# Altium PCB Board_Large_Unit_Altium.pcbdoc
Units mil, origin at the board's own origin, x right, y up, seen from the top; angles counter-clockwise.
Board outline 4364.75 x 4997.56 mil, 2 copper layers (Top Layer, Bottom Layer); 46 components, 24 nets, 152 pads, 33 vias.
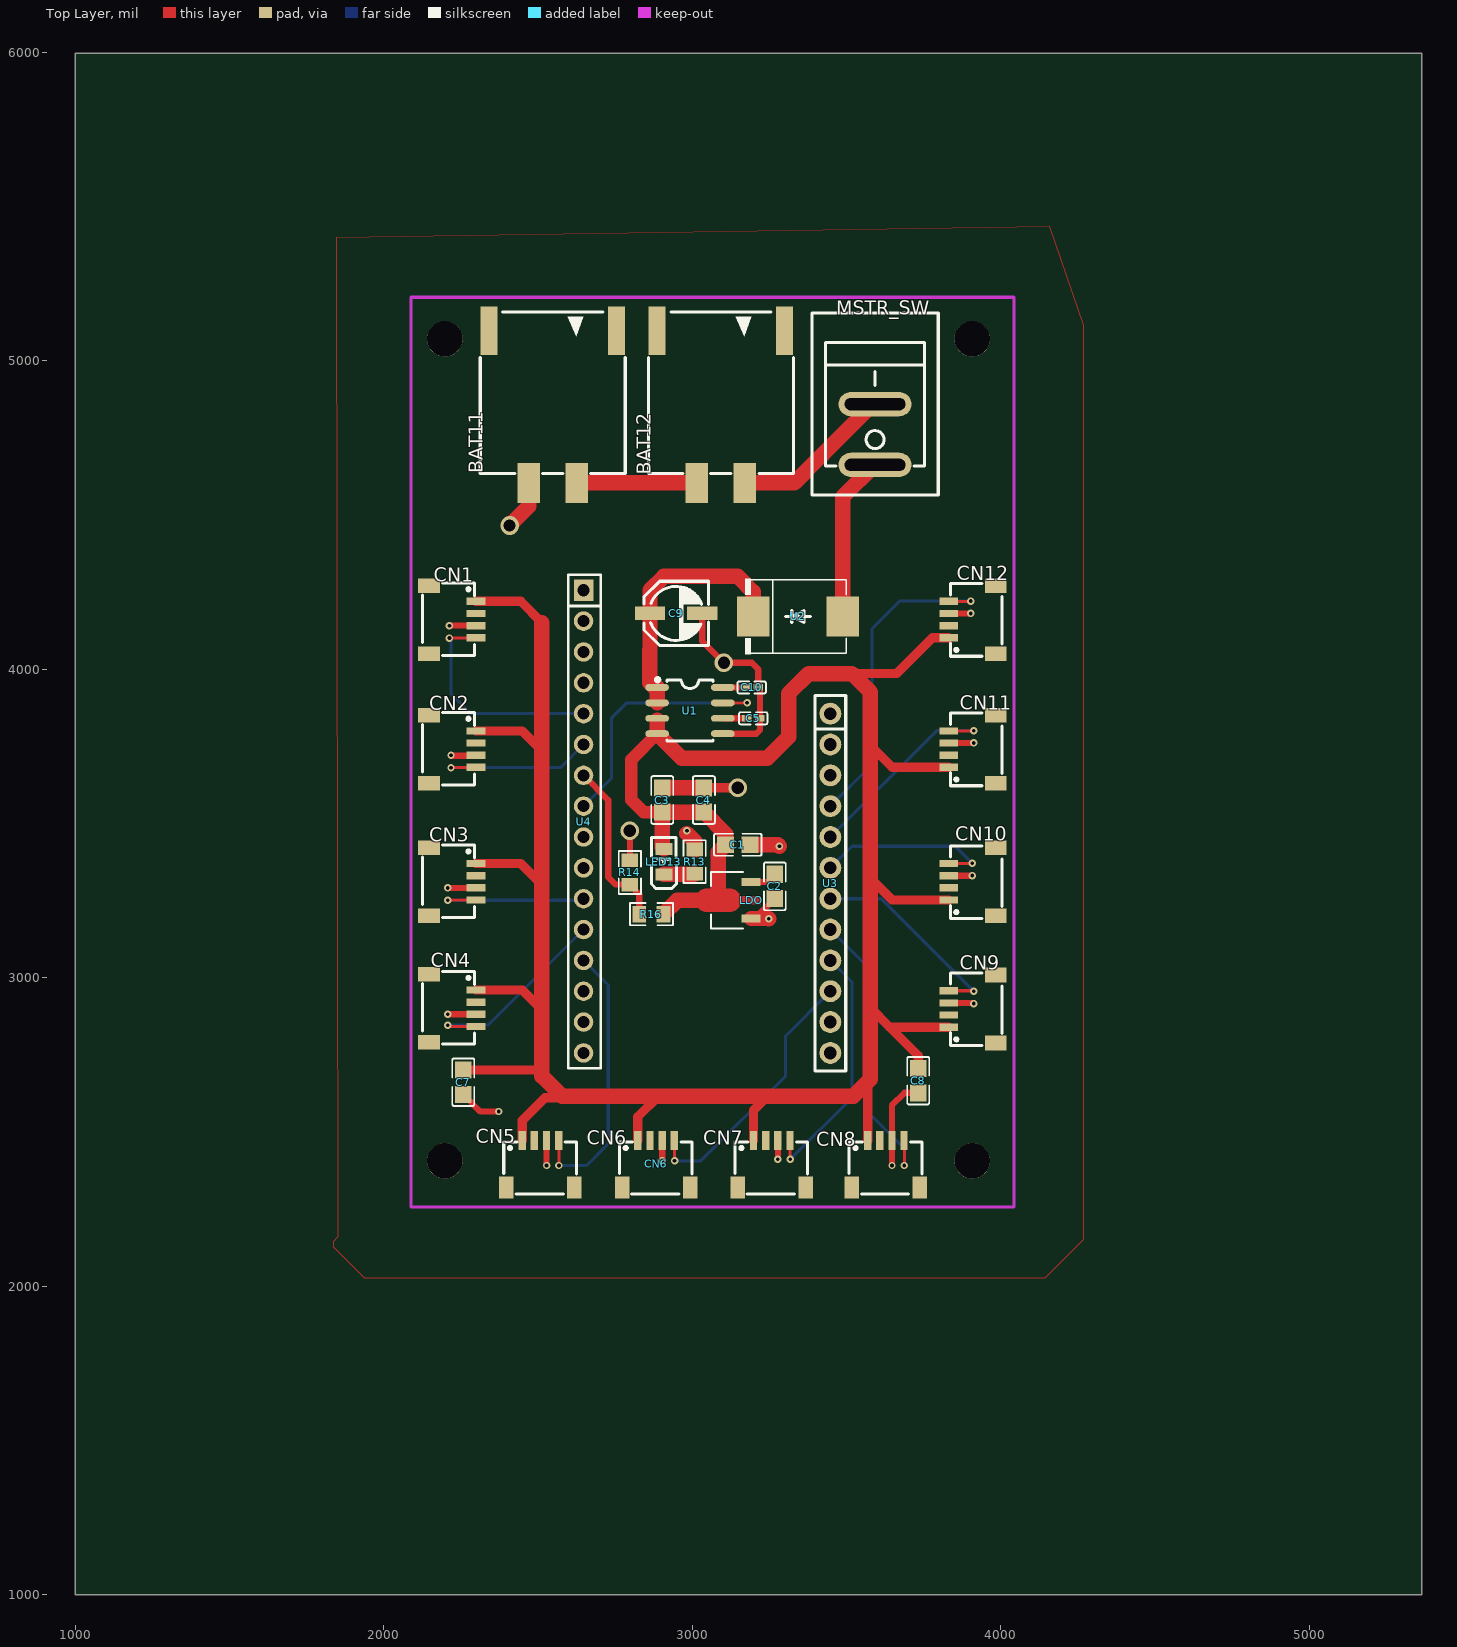
[diagram p0: Top Layer view]
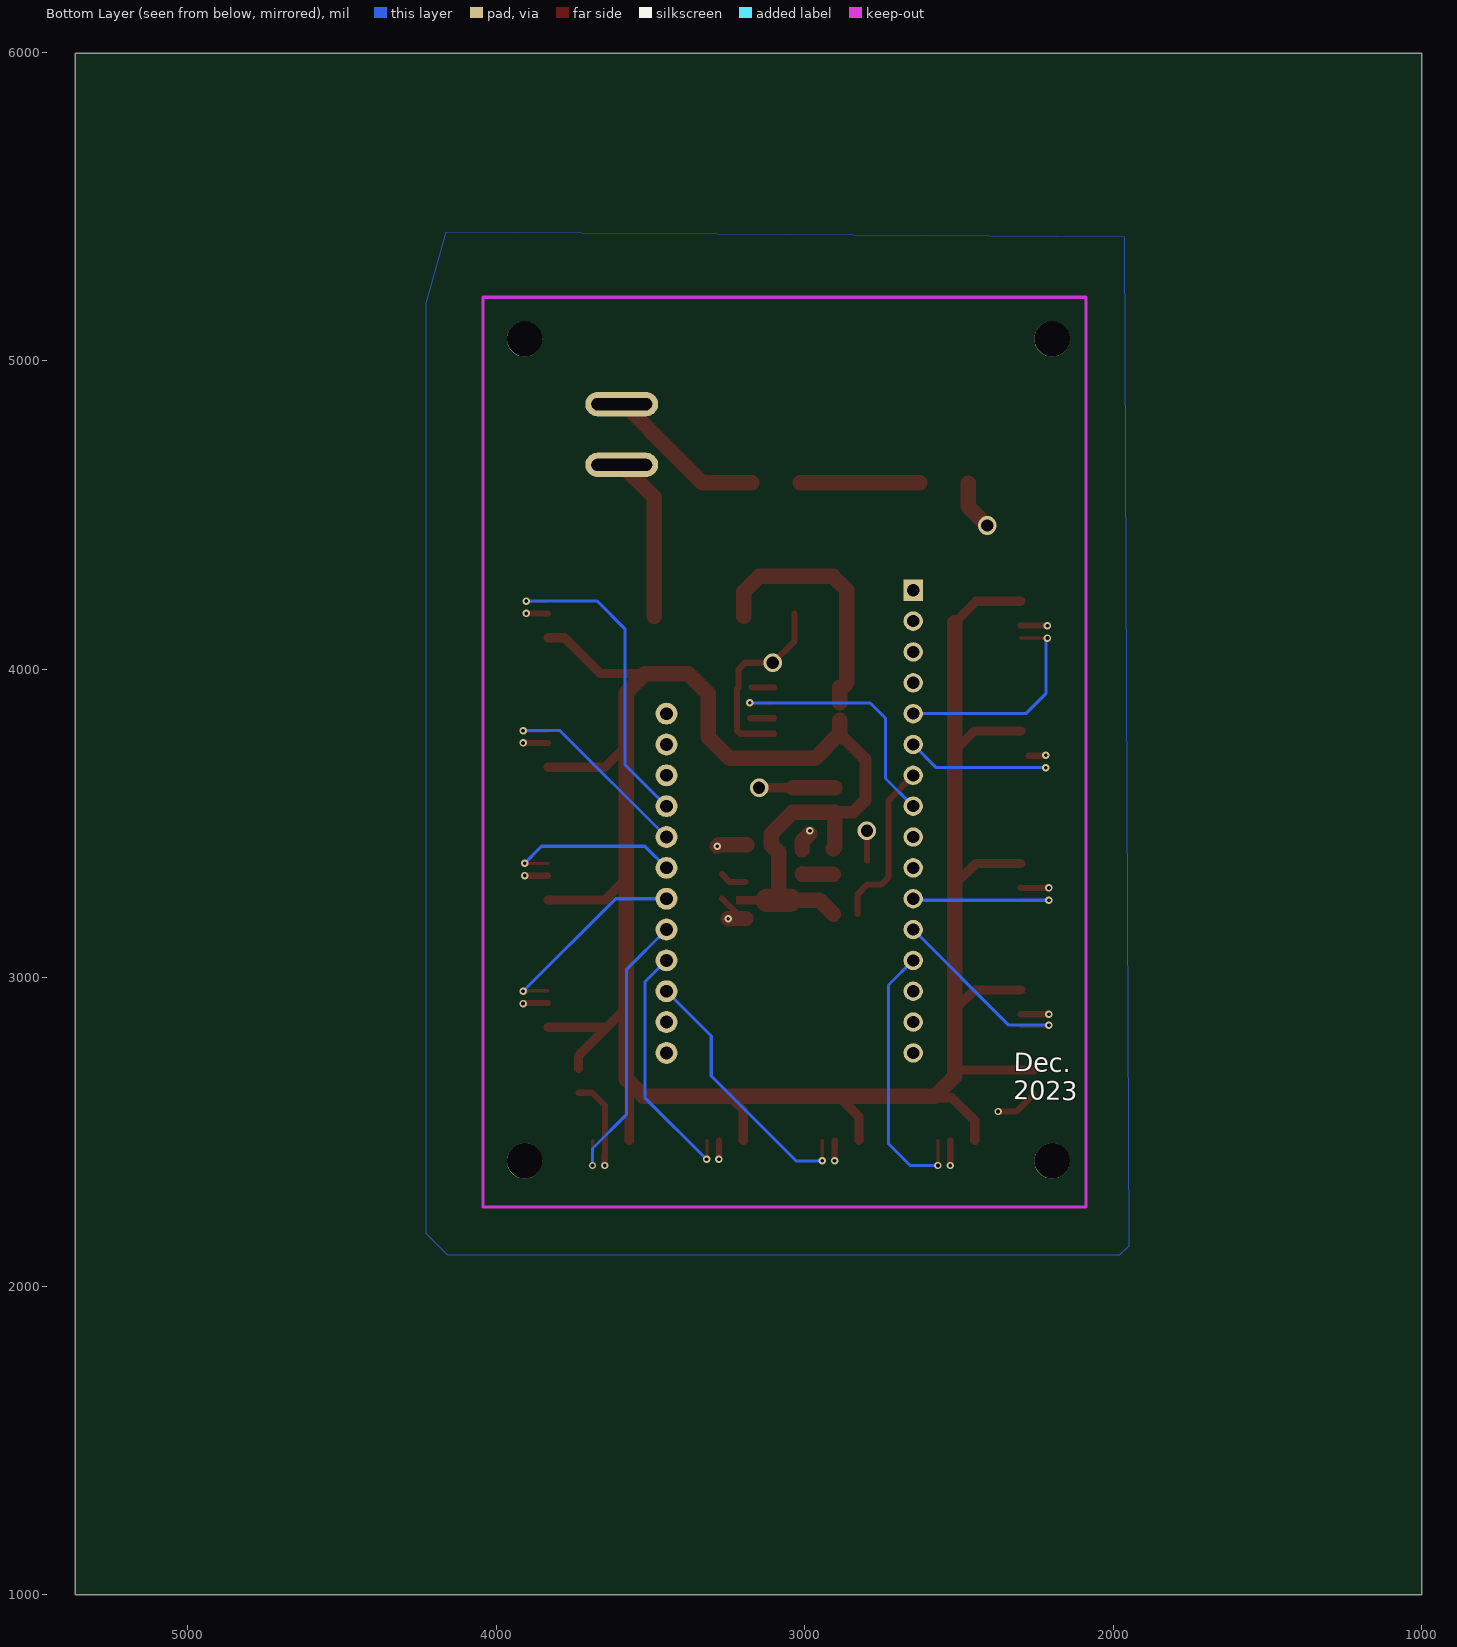
[diagram p1: Bottom Layer view, seen from below]

## Layer stack, top to bottom
Top Layer: signal copper (thickness not stored)
Dielectric: dielectric 12.6, FR-4, Dk 4.8
Bottom Layer: signal copper (thickness not stored)

## Board outline
5364.75,1000 1000,1000 1000,5997.56 5364.75,5997.56

## Components (designator, comment, footprint, x,y, rotation, side; value= is the part's Value field where it differs from the comment)
BAT11 "X9396WRS-02-9TSN" CONN-SMD_X9396WRS-02-9TSN 2547.98,4851.56 r180 top
BAT12 "X9396WRS-02-9TSN" CONN-SMD_X9396WRS-02-9TSN 3092.98,4851.56 r180 top
C1 "1uF" C0805 3147.98,3431.57 r180 top
C2 "1uF" C0805 3267.98,3296.57 r90 top
C3 "1uF" C0805 2902.98,3576.57 r270 top
C4 "22uF" C0805 3037.98,3576.57 r270 top
C5 "1nF" C0402 3197.98,3841.57 r0 top
C7 "22uF" C0805 2257.98,2661.57 r90 top
C8 "22uF" C0805 3732.98,2666.57 r90 top
C9 "100uF" CAP-SMD_BD5.0-L5.3-W5.3-RD 2947.98,4181.56 r180 top
C10 "100nF" C0402 3192.98,3941.57 r180 top
CN1 "SM04B-SRSS-TB (LF)(SN)" CONN-SMD_4P-P1.00_SM04B-SRSS-TB-LF-SN 2222.98,4161.56 r270 top
CN2 "SM04B-SRSS-TB (LF)(SN)" CONN-SMD_4P-P1.00_SM04B-SRSS-TB-LF-SN 2222.98,3741.57 r270 top
CN3 "SM04B-SRSS-TB (LF)(SN)" CONN-SMD_4P-P1.00_SM04B-SRSS-TB-LF-SN 2222.98,3311.57 r270 top
CN4 "SM04B-SRSS-TB (LF)(SN)" CONN-SMD_4P-P1.00_SM04B-SRSS-TB-LF-SN 2222.98,2901.57 r270 top
CN5 "SM04B-SRSS-TB (LF)(SN)" CONN-SMD_4P-P1.00_SM04B-SRSS-TB-LF-SN 2507.98,2396.57 r0 top
CN6 "SM04B-SRSS-TB (LF)(SN)" CONN-SMD_4P-P1.00_SM04B-SRSS-TB-LF-SN 2882.98,2396.57 r0 top
CN7 "SM04B-SRSS-TB (LF)(SN)" CONN-SMD_4P-P1.00_SM04B-SRSS-TB-LF-SN 3257.98,2396.57 r0 top
CN8 "SM04B-SRSS-TB (LF)(SN)" CONN-SMD_4P-P1.00_SM04B-SRSS-TB-LF-SN 3627.98,2396.57 r0 top
CN9 "SM04B-SRSS-TB (LF)(SN)" CONN-SMD_4P-P1.00_SM04B-SRSS-TB-LF-SN 3907.98,2899.07 r90 top
CN10 "SM04B-SRSS-TB (LF)(SN)" CONN-SMD_4P-P1.00_SM04B-SRSS-TB-LF-SN 3907.98,3311.57 r90 top
CN11 "SM04B-SRSS-TB (LF)(SN)" CONN-SMD_4P-P1.00_SM04B-SRSS-TB-LF-SN 3907.98,3741.57 r90 top
CN12 "SM04B-SRSS-TB (LF)(SN)" CONN-SMD_4P-P1.00_SM04B-SRSS-TB-LF-SN 3907.98,4161.56 r90 top
LDO "LR8341A-M50" SOT-89-3_L4.5-W2.5-P1.50-LS4.2-BR 3137.98,3251.57 r0 top
LED13 "SZYY0805YG" LED0805-R-RD_GREEN 2907.98,3376.57 r90 top
MSTR_SW "RS601HL-1010011BB" SW-TH_RS601HL-1010011BB 3592.98,4761.56 r90 top
R13 "10kΩ" R0805 3007.98,3376.57 r270 top
R14 "1MΩ" R0805 2797.98,3341.57 r90 top
R16 "1MΩ" R0805 2867.98,3206.57 r180 top
U1 "ACS712ELCTR-05B-T" SOIC-8_L5.0-W4.0-P1.27-LS6.0-BL 2992.98,3866.57 r270 top
U2 "SS84" SMC_L6.9-W5.9-LS7.9-RD 3342.98,4171.56 r0 top
U3 "PM254-1-12-Z-8.5" HDR-TH_12P-P2.54-V-F 3447.98,3306.57 r270 top
U4 "PM254-1-16-Z-8.5" HDR-TH_16P-P2.54-V-F-A 2647.98,3506.57 r270 top
? "" ? 2106.06,4536.58 r0 top
? "" ? 2246.13,4421.57 r0 top
? "" ? 4452.86,3734.07 r0 top
? "" ? 3065.48,1881.78 r0 top
? "" ? 4228.87,3739.07 r0 top
? "" ? 2142.98,2141.06 r0 top
? "" ? 1911.19,2331.56 r0 top
? "" ? 3975.48,2142.06 r0 top
? "" ? 4262.25,2331.57 r0 top
? "" ? 3975.48,5276.72 r0 top
? "" ? 4172.42,5139.08 r0 top
? "" ? 2142.98,5283.56 r0 top
? "" ? 1849.99,5139.05 r0 top

## Footprints (in the part's own frame and the unit in brackets; to place one, negate y for a bottom-side part, rotate by r counter-clockwise, add the part's x,y. Pads: shape width x height; smd on the part's side, far side on the other; paste and mask are expansions set on the pad)
C0402 [mm]
  rect 0.79x0.54 smd paste-100 mask+0.051: 1(-0.545,0) 2(0.545,0)
  silkscreen extent -1.17,-0.5 1.17,0.5
C0805 [mm]
  rect 1.41x1.35 smd paste-100 mask+0.051: 1(-1,0) 2(1,0)
  silkscreen extent -1.96,-0.9 1.96,0.9
CAP-SMD_BD5.0-L5.3-W5.3-RD [mm]
  rect 2.5x1.1 smd paste+0 mask+0.051: 1(2.15,0) 2(-2.15,0)
  silkscreen extent -2.65,-2.65 2.64,2.65
CONN-SMD_4P-P1.00_SM04B-SRSS-TB-LF-SN [mm]
  rect 0.6x1.55 smd paste+0 mask+0.051: 1(-1.5,1.938) 2(-0.5,1.938) 3(0.501,1.938) 4(1.5,1.938)
  rect 1.2x1.8 smd paste+0 mask+0.051: 5(2.8,-1.938) 6(-2.8,-1.938)
  silkscreen extent -3.02,-2.46 2.96,1.8
CONN-SMD_X9396WRS-02-9TSN [mm]
  rect 1.84x3.3 smd paste+0 mask+0.051: 1(-1.98,6.275) 2(1.98,6.275)
  rect 1.4x4 smd paste+0 mask+0.051: 3(5.25,-6.275) 4(-5.25,-6.275)
  silkscreen extent -5.97,-7.8 5.97,5.5
HDR-TH_12P-P2.54-V-F [mm]
  round 1.8 hole 1.05 paste+0 mask+0.051: 1(-13.97,0) 2(-11.43,0) 3(-8.89,0) 4(-6.35,0) 5(-3.81,0) 6(-1.27,0) 7(1.27,0) 8(3.81,0) 9(6.35,0) 10(8.89,0) 11(11.43,0) 12(13.97,0)
  silkscreen extent -15.45,-1.27 15.45,1.27
HDR-TH_16P-P2.54-V-F-A [mm]
  rect 1.8x1.6 hole 1 paste+0 mask+0.051: 1(-19.05,0)
  round 1.6 hole 1 paste+0 mask+0.051: 2(-16.51,0) 3(-13.97,0) 4(-11.43,0) 5(-8.89,0) 6(-6.35,0) 7(-3.81,0) 8(-1.27,0) 9(1.27,0) 10(3.81,0) 11(6.35,0) 12(8.89,0) 13(11.43,0) 14(13.97,0) 15(16.51,0) 16(19.05,0)
  silkscreen extent -20.32,-1.27 20.32,1.4
LED0805-R-RD_GREEN [mm]
  rect 1x1.4 smd paste+0 mask+0.051: 1(1.05,0) 2(-1.05,0)
  silkscreen extent -2.22,-1.04 1.99,1.01
R0805 [mil]
  rect 44.59x54.21 smd paste-3937.01 mask+2: 1(-39.37,0) 2(39.37,0)
  silkscreen extent -69,-36 69,36
SMC_L6.9-W5.9-LS7.9-RD [mm]
  rect 2.7x3.3 smd paste+0 mask+0.051: 1(-3.686,0) 2(3.686,0)
  silkscreen extent -4.36,-3.1 3.98,3.1
SOIC-8_L5.0-W4.0-P1.27-LS6.0-BL [mil]
  oval 22.38x76.78 smd paste+0 mask+2: 1(-75,-106.5) 2(-25,-106.5) 3(25,-106.5) 4(75,-106.5) 5(75,106.5) 6(25,106.5) 7(-25,106.5) 8(-75,106.5)
  silkscreen extent -106,-111 98,75
SOT-89-3_L4.5-W2.5-P1.50-LS4.2-BR [mm]
  rect 1.575x0.672 smd paste+0 mask+0.051: 1(1.356,-1.5) 3(1.356,1.5)
  Top Layer region: -2.283,0.95 -0.429,0.95 -0.384,0.949 -0.34,0.946 -0.296,0.94 -0.252,0.933 -0.208,0.924 -0.165,0.912 -0.123,0.899 -0.081,0.884 -0.04,0.866 0,0.847 0.04,0.826 0.078,0.803 0.115,0.779 0.151,0.752 0.185,0.724 0.219,0.695 0.251,0.664 0.281,0.631 0.31,0.597 0.337,0.562 0.362,0.525 0.386,0.488 0.408,0.449 0.428,0.409 0.447,0.33 2.144,0.33 2.144,-0.33 0.447,-0.33 0.428,-0.409 0.408,-0.449 0.386,-0.488 0.362,-0.526 0.337,-0.562 0.31,-0.597 0.281,-0.631 0.251,-0.664 0.219,-0.695 0.185,-0.725 0.151,-0.753 0.115,-0.779 0.078,-0.804 0.04,-0.827 0,-0.848 -0.04,-0.867 -0.081,-0.884 -0.123,-0.899 -0.165,-0.913 -0.208,-0.924 -0.252,-0.934 -0.296,-0.941 -0.34,-0.946 -0.384,-0.949 -0.429,-0.95 -2.283,-0.95 -2.328,-0.949 -2.372,-0.946 -2.416,-0.941 -2.46,-0.934 -2.504,-0.924 -2.547,-0.913 -2.589,-0.899 -2.631,-0.884 -2.672,-0.867 -2.713,-0.848 -2.752,-0.827 -2.79,-0.804 -2.827,-0.779 -2.863,-0.753 -2.898,-0.725 -2.931,-0.695 -2.963,-0.664 -2.993,-0.631 -3.022,-0.597 -3.049,-0.562 -3.075,-0.526 -3.098,-0.488 -3.12,-0.449 -3.141,-0.409 -3.159,-0.369 -3.175,-0.327 -3.189,-0.285 -3.202,-0.242 -3.212,-0.199 -3.22,-0.155 -3.227,-0.111 -3.231,-0.067 -3.233,-0.022 -3.233,0.022 -3.231,0.067 -3.227,0.111 -3.22,0.155 -3.212,0.199 -3.202,0.242 -3.189,0.285 -3.175,0.327 -3.159,0.369 -3.141,0.409 -3.12,0.449 -3.098,0.488 -3.075,0.525 -3.049,0.562 -3.022,0.597 -2.993,0.631 -2.963,0.664 -2.931,0.695 -2.898,0.724 -2.863,0.752 -2.827,0.779 -2.79,0.803 -2.752,0.826 -2.713,0.847 -2.672,0.866 -2.631,0.884 -2.589,0.899 -2.547,0.912 -2.504,0.924 -2.46,0.933 -2.416,0.94 -2.372,0.946 -2.328,0.949
  silkscreen extent -1.95,-2.33 0.7,2.33
SW-TH_RS601HL-1010011BB [mm]
  oval 2x6 hole 1 slot 5 at 90 deg paste+0 mask+0.05: 1(-2.5,0) 2(2.5,0)
  silkscreen extent -4.99,-5.21 9.99,5.21
? [mil]

## Free pads (board coordinates)
  round 115 hole 115 unplated paste+0: ""(2197.98,2406.57) ""(2197.98,5071.56) ""(3907.98,2406.57) ""(3907.98,5071.56)

## Via types
v1: diameter 24.02, hole 12, Top Layer to Bottom Layer, tented both sides, 29 vias
v2: diameter 60, hole 40, Top Layer to Bottom Layer, tented both sides, 4 vias

## Nets (pads, with @x,y where several pads share a name; then routed paths per layer and width w, separated by ;. In a path a pad name is that pad's centre, name@x,y a point inside that pad or via, vN(x,y) a via of type N, cw(c..) or ccw(c..) an arc to the next point about the centre after c; other vN are vias at no path point)
+5V: C2.2 C10.2 CN1.2 CN2.2 CN3.2 CN4.2 CN5.2 CN6.2 CN7.2 CN8.2 CN9.2 CN10.2 CN11.2 CN12.2 LDO.3 U1.8 | length 159.1
  Top Layer w20: U1.8 C10.2 ; LDO.3 3242.67,3310.62 C2.2
BAT: C1.2 C3.2 C4.2 C7.2 C8.2 CN1.1 CN2.1 CN3.1 CN4.1 CN5.1 CN6.1 CN7.1 CN8.1 CN9.1 CN10.1 CN11.1 CN12.1 LED13.1 R16.1 U1.3 U1.4 | length 9339.9
  Top Layer w30: C7.2 2493.61,2700.93 2512.98,2681.57 ; CN4.1 2449.62,2960.61 2512.98,2897.25 ; CN3.1 2444.62,3370.62 2512.98,3302.25 ; CN2.1 2448.62,3800.62 2512.98,3736.25 ; CN1.1 2443.93,4220.61 2512.98,4151.56 ; CN5.1 2448.93,2537.51 2522.98,2611.57 2577.98,2611.57 ; CN6.1 2823.93,2549.91 2890.59,2616.57 ; CN7.1 3198.93,2570.47 3245.03,2616.57 ; 3517.98,3986.57 3662.98,3986.57 3778.93,4102.52 CN12.1 ; CN8.1 3568.93,2662.51 3577.98,2671.57 ; 3577.98,2902.7 3640.66,2840.01 ; 3577.98,3322.84 3648.3,3252.52 CN10.1 ; 3577.98,3752.98 3648.45,3682.52 CN11.1 ; C8.2 3732.98,2747.7 3640.66,2840.01 ; CN9.1 3640.66,2840.01
  Top Layer w40: U1.4 2802.98,3708.07 2802.98,3576.57 2842.35,3537.2 C3.2
  Top Layer w50: 2512.98,4151.56 2512.98,2681.57 2577.98,2616.57 3522.98,2616.57 3577.98,2671.57 3577.98,3926.57 3517.98,3986.57 3377.98,3986.57 3312.98,3921.57 3312.98,3781.57 3242.98,3711.57 2966.48,3711.57 U1.4 U1.3@2886.38,3835.56 ; R16.1 2952.34,3251.55 3084.59,3251.55 3084.59,3407.54 C1.2 3108.58,3465.97 C4.2 ; LED13.1 2902.98,3422.91 C3.2 2966.18,3537.2 C4.2
BAT11_1: BAT11.1 BAT12.2 | length 389.1
  Top Layer w50: BAT11.1 2790.93,4604.52 BAT12.2
BAT_DEC: R14.1 R16.2 U4.7 | length 551.6
  Top Layer w20: U4.7 2727.98,3576.57 2727.98,3326.57 2752.38,3302.16 R14.1 ; R14.1 2828.61,3271.57 R16.2
GND: BAT11.2 C1.1 C2.1 C3.1 C4.1 C5.2 C7.1 C8.1 C9.2 C10.1 CN1.3 CN2.3 CN3.3 CN4.3 CN5.3 CN6.3 CN7.3 CN8.3 CN9.3 CN10.3 CN11.3 CN12.3 LDO.1 R13.1 R14.2 U1.5 U4.4 | length 2739.6
  Top Layer w20: v1(2207.98,2881.57) 2208.28,2881.86 CN4.3 ; v1(2207.98,3291.57) 2298.96,3291.57 CN3.3 ; v1(2212.98,4141.56) 2213.28,4141.86 CN1.3 ; v1(2217.98,3721.57) 2219.35,3720.19 CN2.3@2274.26,3720.19 ; C7.1 2313.61,2566.57 v1(2372.98,2566.57) ; CN5.3 2527.98,2472.55 v1(2527.98,2391.57) ; R14.2 v2(2797.98,3476.57) ; CN6.3@2902.68,2472.86 v1(2902.98,2406.57) ; C9.2 3032.63,4091.91 v2(3102.98,4021.57) 3192.98,4021.57 3214.44,4000.11 C10.1 3219.44,3936.57 C5.2 3219.44,3803.03 3207.98,3791.57 U1.5 ; LDO.1 3203.3,3192.51 C2.1 ; CN7.3@3277.68,2472.86 v1(3277.98,2411.57) ; v1(3647.98,2391.57) 3647.98,2426.57 3647.68,2426.86 CN8.3 3647.68,2586.26 3688.61,2627.2 C8.1 ; CN9.3 3910.78,2918.76 v1(3912.98,2916.57) ; CN10.3 3907.68,3331.26 v1(3907.98,3331.57) ; CN11.3 3912.68,3761.26 v1(3912.98,3761.57) ; CN12.3 3902.68,4181.27 v1(3902.98,4181.56)
  Top Layer w30: C4.1@3037.98,3615.97 v2(3147.98,3616.57)
  Top Layer w50: v2(2407.98,4466.56) 2470.08,4528.66 BAT11.2@2470.08,4604.47 ; C3.1 C4.1 ; v1@2982.98,3467.93 3007.98,3442.93 R13.1 ; C1.1 3277.98,3431.57 v1(3282.98,3426.57) ; LDO.1 3247.03,3192.51 v1(3247.98,3191.57)
  other v1: 2982.98,3476.57
MSTR_SW_1: MSTR_SW.1 U2.2 | length 535
  Top Layer w50: U2.2 3488.11,4558.28 MSTR_SW.1
MSTR_SW_2: BAT12.1 MSTR_SW.2 | length 527.9
  Top Layer w50: BAT12.1 3330.95,4604.52 3421.42,4694.98 3586.42,4859.98 MSTR_SW.2
R13_2: LED13.2 R13.2 | length 100.8
  Top Layer w50: LED13.2 3006,3335.22 R13.2
S$1126: 
SENS_CURRENT: U1.7 U4.8 | length 861.5
  Top Layer w10: U1.7 v1(3177.98,3891.57)
  Bottom Layer w10: U4.8 2737.98,3646.57 2737.98,3841.57 2787.98,3891.57 v1(3177.98,3891.57)
TX1: CN1.4 U4.5 | length 725.7
  Top Layer w10: v1(2212.98,4101.56) 2213.91,4102.49 CN1.4
  Bottom Layer w10: v1(2212.98,4101.56) 2217.98,4096.56 2217.98,3921.57 2282.98,3856.57 U4.5
TX2: CN2.4 U4.6 | length 542.7
  Top Layer w10: v1(2217.98,3681.57) 2298.33,3681.57 CN2.4
  Bottom Layer w10: v1(2217.98,3681.57) 2572.98,3681.57 U4.6
TX3: CN3.4 U4.11 | length 536.3
  Top Layer w10: v1(2207.98,3251.57) CN3.4
  Bottom Layer w10: v1(2207.98,3251.57) 2647.98,3251.57 U4.11
TX4: CN4.4 U4.12 | length 661.4
  Top Layer w10: v1(2207.98,2846.57) 2212.05,2842.49 CN4.4
  Bottom Layer w10: v1(2207.98,2846.57) 2337.98,2846.57 U4.12
TX5: CN5.4 U4.13 | length 898.8
  Top Layer w10: CN5.4@2567.05,2472.84 2567.98,2471.92 v1(2567.98,2391.57)
  Bottom Layer w10: v1(2567.98,2391.57) 2657.98,2391.57 2727.98,2461.57 2727.98,2976.57 U4.13
TX6: CN6.4 U3.10 | length 875.6
  Top Layer w10: CN6.4@2942.05,2472.84 2942.98,2471.92 v1(2942.98,2406.57)
  Bottom Layer w10: v1(2942.98,2406.57) 3027.98,2406.57 3302.98,2681.57 3302.98,2811.57 U3.10
TX7: CN7.4 U3.9 | length 818.5
  Top Layer w10: CN7.4@3317.05,2472.84 3317.05,2412.49 v1(3317.98,2411.57)
  Bottom Layer w10: v1(3317.98,2411.57) 3517.98,2611.57 3517.98,2986.57 U3.9
TX8: CN8.4 U3.8 | length 946.1
  Top Layer w10: CN8.4@3687.05,2472.84 3687.98,2471.92 v1(3687.98,2391.57)
  Bottom Layer w10: U3.8 3577.98,3026.57 3577.98,2556.57 3687.98,2446.57 v1(3687.98,2391.57)
TX9: CN9.4 U3.7 | length 671.2
  Top Layer w10: CN9.4 3911.41,2958.14 v1(3912.98,2956.57)
  Bottom Layer w10: U3.7 3612.98,3256.57 v1(3912.98,2956.57)
TX10: CN10.4 U3.6 | length 588.4
  Top Layer w10: CN10.4 3907.05,3370.64 v1(3907.98,3371.57)
  Bottom Layer w10: U3.6 3517.98,3426.57 3852.98,3426.57 v1(3907.98,3371.57)
TX11: CN11.4 U3.5 | length 689.6
  Top Layer w10: CN11.4 3912.05,3800.64 v1(3912.98,3801.57)
  Bottom Layer w10: U3.5 3792.98,3801.57 v1(3912.98,3801.57)
TX12: CN12.4 U3.4 | length 1059.9
  Top Layer w10: CN12.4 3902.05,4220.64 v1(3902.98,4221.56)
  Bottom Layer w10: U3.4 3582.98,3691.57 3582.98,4131.56 3672.98,4221.56 v1(3902.98,4221.56)
U1_6: C5.1 U1.6 | length 77
  Top Layer w20: U1.6 C5.1
VIN: C9.1 U1.1 U1.2 U2.1 | length 833.9
  Top Layer w50: C9.1 2863.33,4256.91 2907.98,4301.56 3147.98,4301.56 3197.85,4251.69 U2.1@3197.85,4171.56 ; C9.1@2863.38,4181.56 2862.98,3956.57 2877.98,3941.57 U1.1 U1.2
pads on no net: BAT11.3 BAT11.4 BAT12.3 BAT12.4 CN1.5 CN1.6 CN2.5 CN2.6 CN3.5 CN3.6 CN4.5 CN4.6 CN5.5 CN5.6 CN6.5 CN6.6 CN7.5 CN7.6 CN8.5 CN8.6 CN9.5 CN9.6 CN10.5 CN10.6 CN11.5 CN11.6 CN12.5 CN12.6 U3.1 U3.2 U3.3 U3.11 U3.12 U4.1 U4.2 U4.3 U4.9 U4.10 U4.14 U4.15 U4.16

## Polygon pours and split planes (outlines as drawn)
GND on Bottom Layer (solid): 1962.98,5401.56 4162.98,5416.56 4227.98,5186.56 4227.98,2171.57 4157.98,2101.57 1977.98,2101.57 1947.98,2131.57
+5V on Top Layer (solid): 1847.98,5401.56 4157.98,5436.56 4267.98,5116.56 4267.98,2151.57 4142.98,2026.57 1937.98,2026.57 1837.98,2126.57 1837.98,2146.57 1852.98,2161.57

## Silkscreen, mask and mechanical layers (free items; w line width, h text height)
Top Overlay:
  text "CN6" at 2657.98,2459.07 h45
Bottom Overlay:
  text "Dec. / 2023" at 2323.5,2606.57 h60 r1